# EAGLE board LCmeter0-perfboard-norelay (EAGLE 7.3.0)
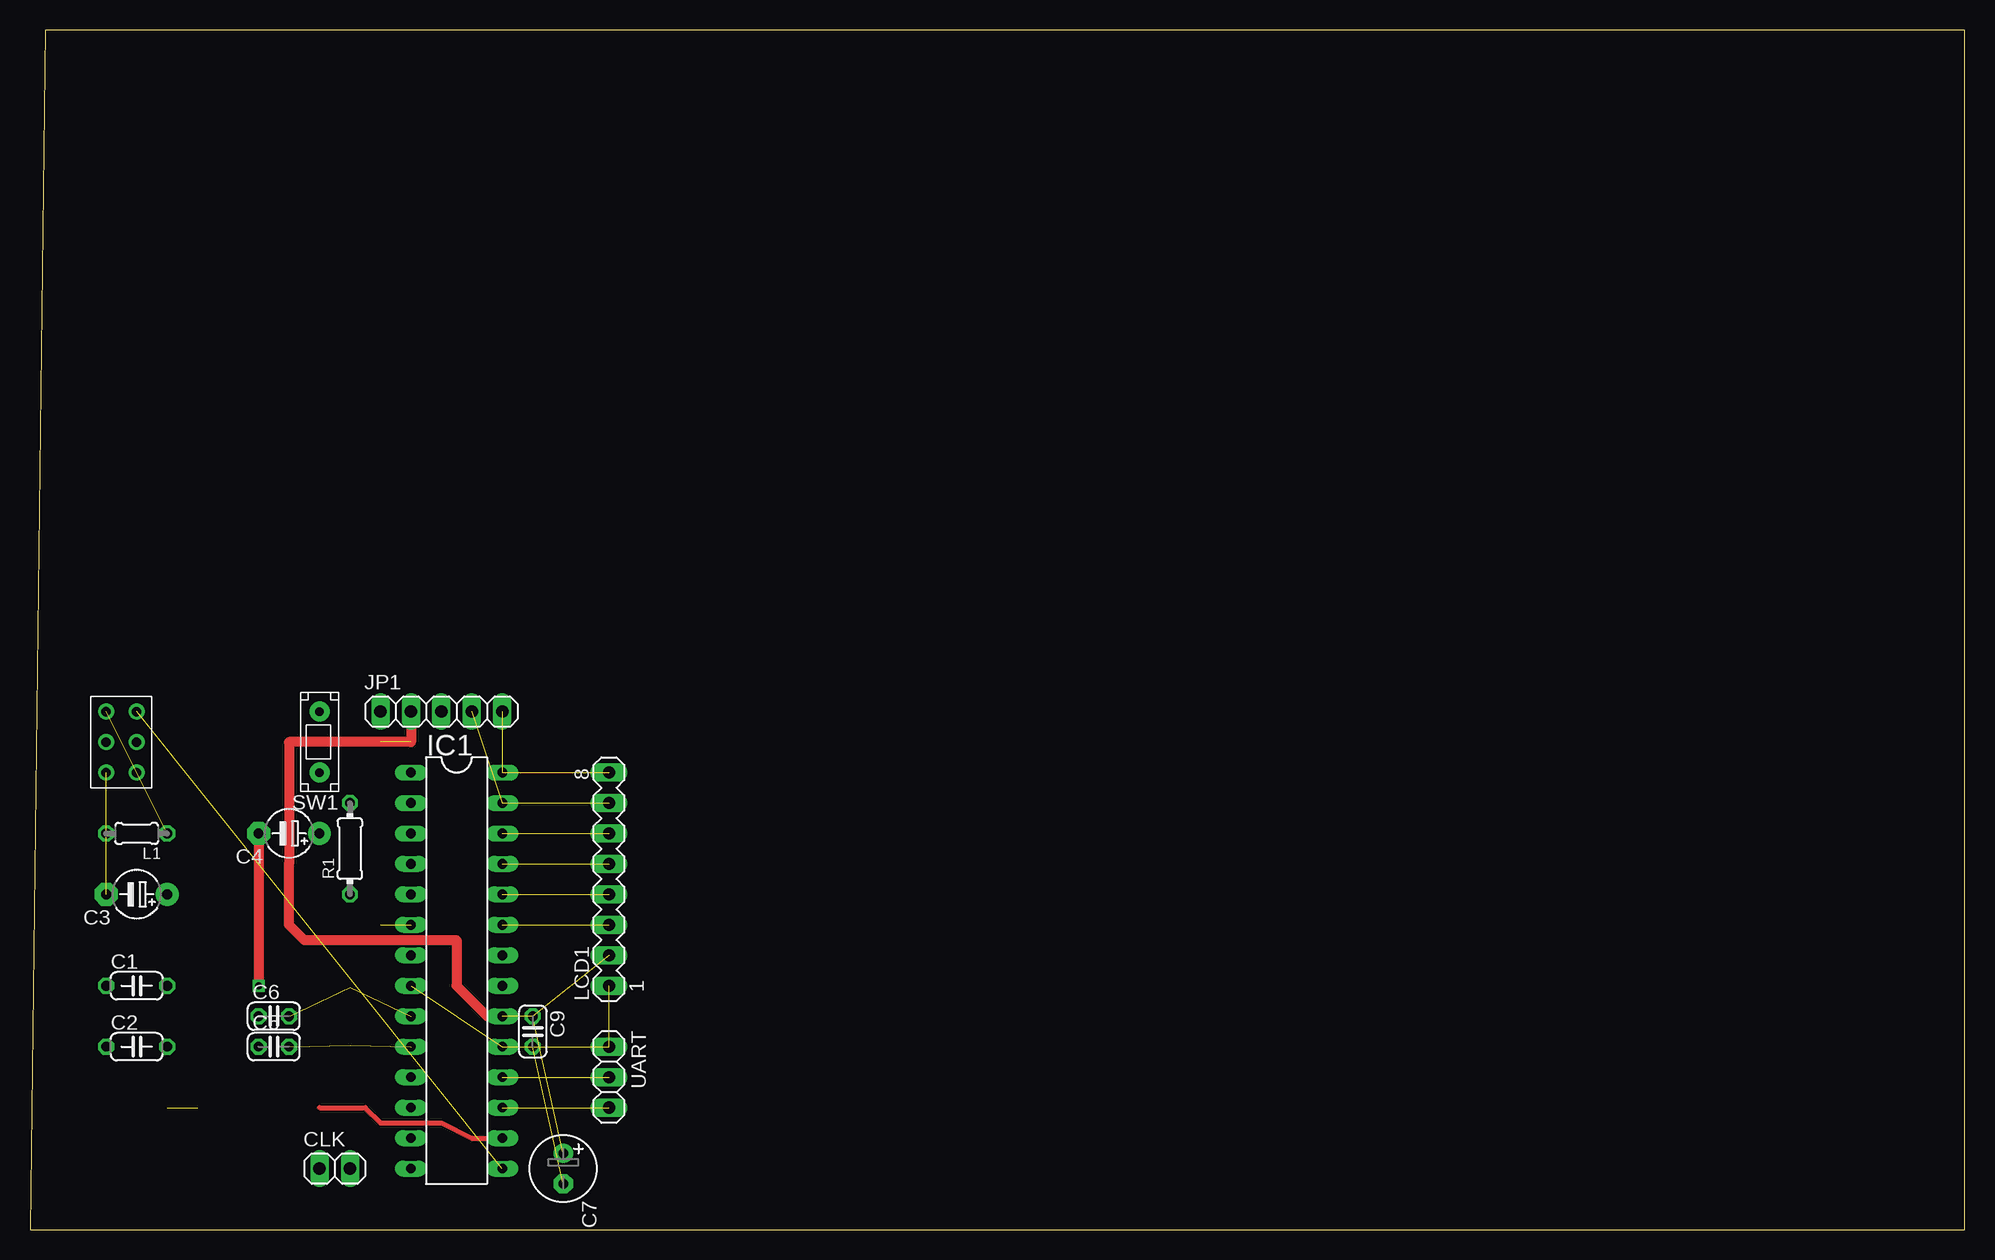
[diagram p0: board, top side]
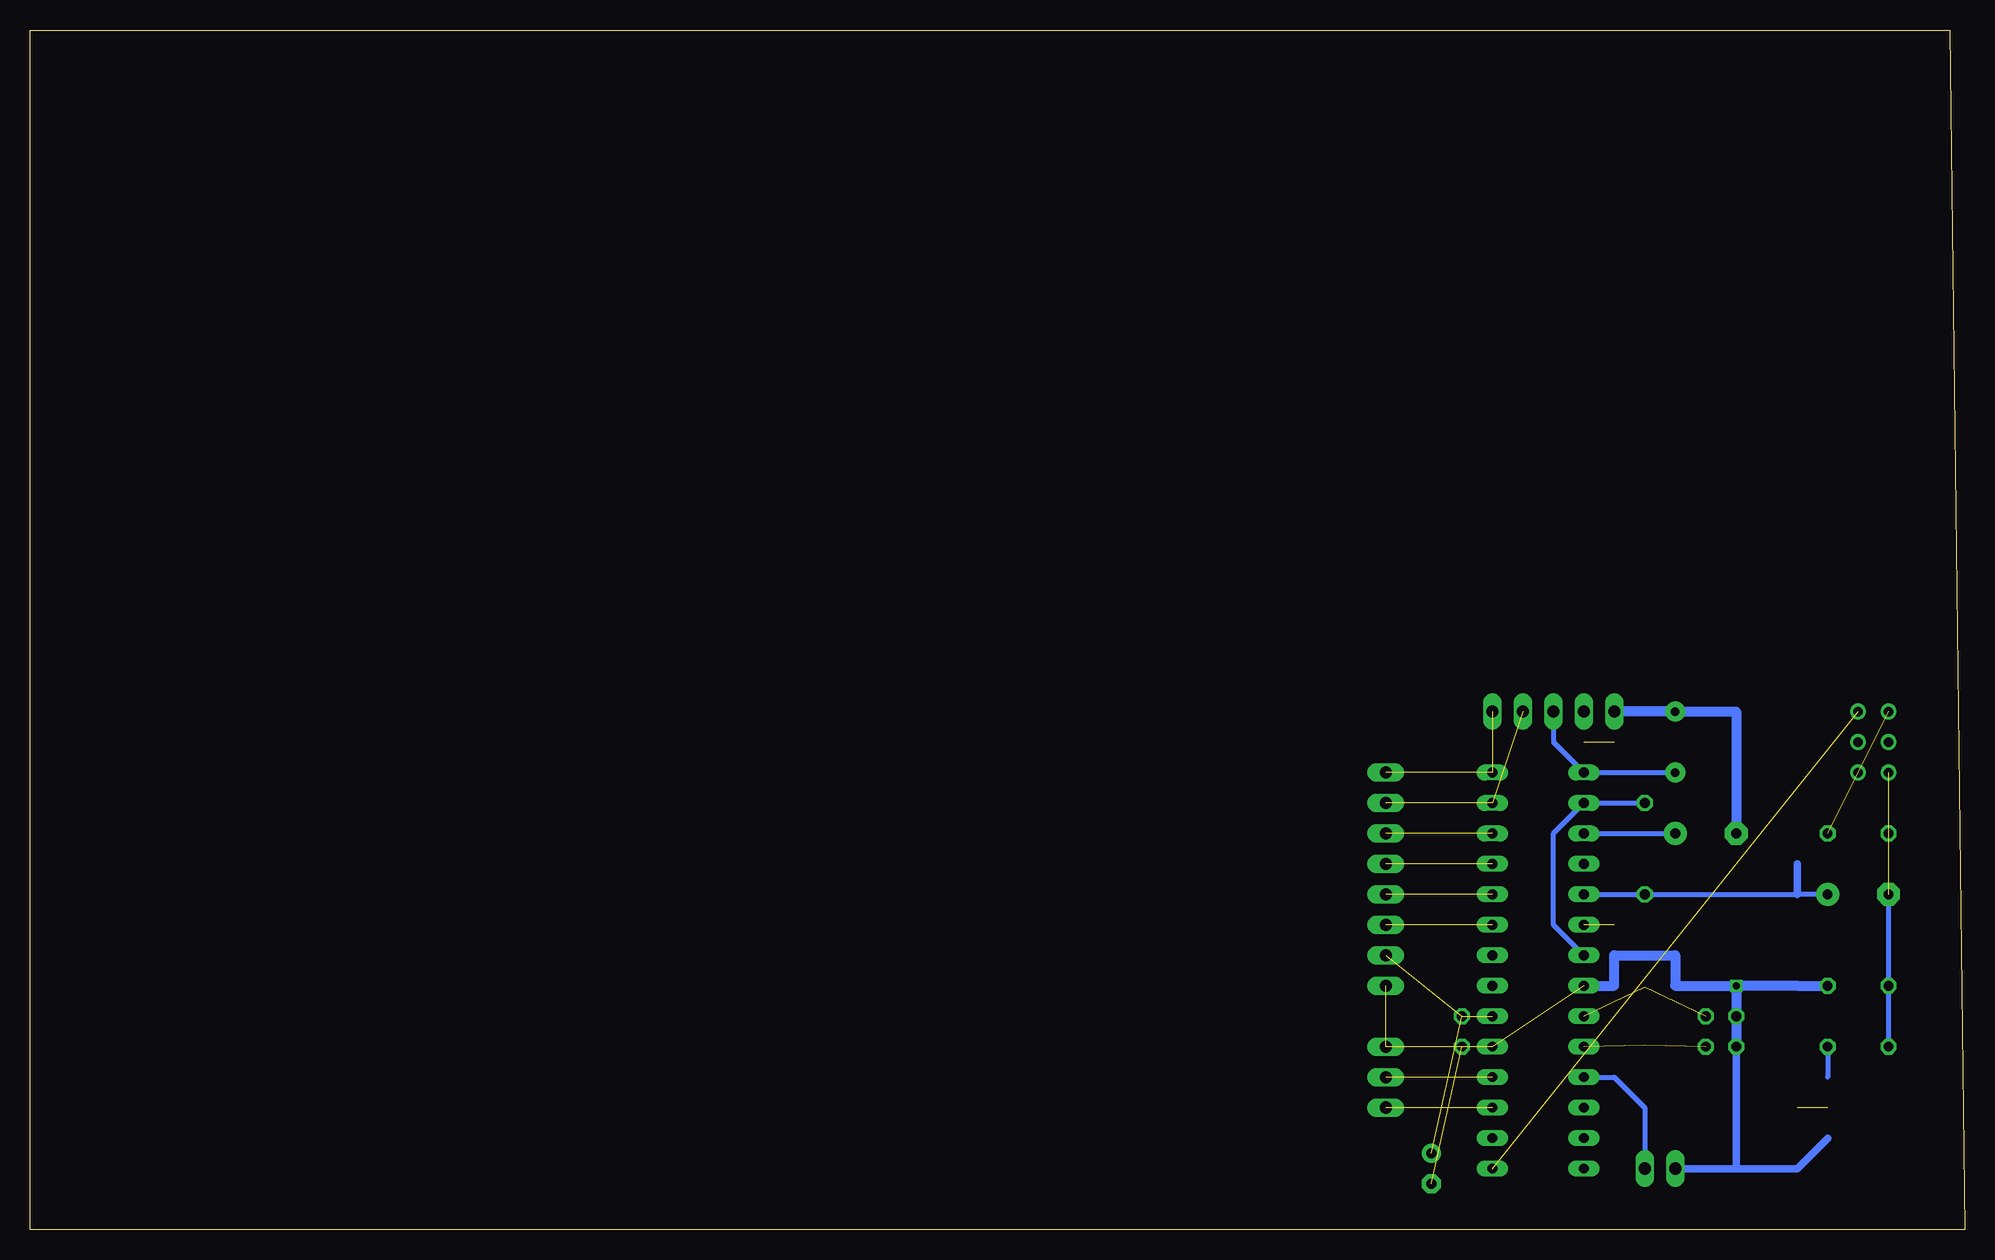
[diagram p1: board, bottom side, seen from below]

Size 161.27 x 100 mm. Coordinates in mm from the lower left corner, seen from the top.
Outline: 0,0 161.27,0 161.27,100 1.27,100 0,0
Copper layers (1*16): Top 0.035mm / dielectric 1.5mm / Bottom 0.035mm
Design rules "default": minimum track width 10mil, minimum drill 24mil, track to track 8mil, track to pad 8mil, pad to pad 8mil, via to via 8mil, smd to smd 8mil, copper to edge 40mil, drill to drill 8mil, minimum pad ring 10mil, minimum via ring 8mil, stop-mask expansion 4mil, vias tented up to drill 0mil, thermal gap 10mil

## Footprints (pad centres in the part's own frame; a part is rotated, then mirrored left to right if it is on the bottom)
C050-024X044 = drill 0.813 octagon: 1 -2.54,0; 2 2.54,0
E5-4 = drill 0.813 pad 1.905: + -2.54,0 | drill 0.813 pad 1.905 octagon: - 2.54,0
C025-024X044 = drill 0.813 octagon: 1 -1.27,0; 2 1.27,0
E2,5-6 = drill 0.813 pad 1.6: + -1.27,0 | drill 0.813 pad 1.6 octagon: - 1.27,0
1X02 = drill 1.016 long: 1 -1.27,0; 2 1.27,0
DIL28-3 = drill 0.813 long: 1 -16.51,-3.81; 2 -13.97,-3.81; 3 -11.43,-3.81; 4 -8.89,-3.81; 5 -6.35,-3.81; 6 -3.81,-3.81; 7 -1.27,-3.81; 8 1.27,-3.81; 9 3.81,-3.81; 10 6.35,-3.81; 11 8.89,-3.81; 12 11.43,-3.81; 13 13.97,-3.81; 14 16.51,-3.81; 15 16.51,3.81; 16 13.97,3.81; 17 11.43,3.81; 18 8.89,3.81; 19 6.35,3.81; 20 3.81,3.81; 21 1.27,3.81; 22 -1.27,3.81; 23 -3.81,3.81; 24 -6.35,3.81; 25 -8.89,3.81; 26 -11.43,3.81; 27 -13.97,3.81; 28 -16.51,3.81
1X05 = drill 1.016 long: 1 -5.08,0; 2 -2.54,0; 3 0,0; 4 2.54,0; 5 5.08,0
0204/5 = drill 0.813 octagon: 1 -2.54,0; 2 2.54,0
MA08-1 = drill 1.016 long: 1 -8.89,0; 2 -6.35,0; 3 -3.81,0; 4 -1.27,0; 5 1.27,0; 6 3.81,0; 7 6.35,0; 8 8.89,0
0204/7 = drill 0.813 octagon: 1 -3.81,0; 2 3.81,0
PB-5-1 = drill 0.7 pad 1.676: 2 1.27,1.27; 4 1.27,6.35
DPDT = drill 0.8: 1-1 0,1.27; 1-2 -2.54,1.27; 1-3 2.54,1.27; 2-1 0,-1.27; 2-2 -2.54,-1.27; 2-3 2.54,-1.27
1X03 = drill 1.016 long: 1 -2.54,0; 2 0,0; 3 2.54,0

## Placement (x,y rotation side)
C1  1nF  [C050-024X044]  8.89,20.32 0 top
C2  1nF  [C050-024X044]  8.89,15.24 0 top
C3  10μF  [E5-4]  8.89,27.94 180 top
C4  10μF  [E5-4]  21.59,33.02 180 top
C5  33pF  [C025-024X044]  20.32,15.24 0 top
C6  33pF  [C025-024X044]  20.32,17.78 0 top
C7  100μF  [E2,5-6]  44.45,5.08 270 top
C9  100nF  [C025-024X044]  41.91,16.51 270 top
CLK  [1X02]  25.4,5.08 0 top
IC1  PIC16F876A-X/SP  [DIL28-3]  35.56,21.59 270 top
JP1  [1X05]  34.29,43.18 0 top
L1  860u  [0204/5]  8.89,33.02 180 top
LCD1  HD44780  [MA08-1]  48.26,29.21 90 top
Q1  20MHz  [HC49/S]  26.67,17.78 270 top
Q2  BC548  [TO92-EBC]  12.7,10.16 270 top
R1  100kΩ  [0204/7]  26.67,31.75 90 top
R2  100kΩ  [0204/7']  13.97,24.13 90 top
R3  100kΩ  [0204/7']  17.78,30.48 0 top
R4  47kΩ  [0204V]  29.21,34.29 90 top
R5  4.7kΩ  [0204/7']  25.4,25.4 180 top
R6  10kΩ  [0207/10]  19.05,10.16 180 top
R10  4.7kΩ  [0204V]  29.21,39.37 90 top
SW1  SPST  [PB-5-1]  25.4,44.45 180 top
SW2  DPDT  [DPDT]  7.62,40.64 90 top
UART  [1X03]  48.26,12.7 270 top

## Library data of the parts
C1-C7 C9 L1 R1 = rcl
CLK JP1 UART = pinhead
IC1 SW1 SW2 = mcu
LCD1 = con-lstb; OC_FARNELL: unknown; OC_NEWARK: unknown
Q1 = q; OC_FARNELL: 1667008; OC_NEWARK: unknown
Q2 = t
R2-R6 R10 = r

## Nets
/LC: IC1.15 SW2.2-3
/MCLR: IC1.1 JP1.3 R10.1 SW1.4
A0: IC1.2 IC1.7 R1.2 R4.2
A1: C4.+ IC1.3 R4.1
A3: C3.+ IC1.5 R1.1 R2.2 R3.1
A4: IC1.6 R5.1
C2_CON: C2.2 Q2.C
CCAP: IC1.16 R6.1
D4: IC1.25 LCD1.5
D5: IC1.26 LCD1.6
D6: IC1.27 JP1.4 LCD1.7
D7: IC1.28 JP1.5 LCD1.8
E: IC1.24 LCD1.4
GND: C1.2 C4.- C5.1 C6.1 C7.- C9.2 CLK.1 IC1.8 IC1.19 JP1.1 LCD1.1 Q2.E R2.1 SW1.2 UART.1
N$1: CLK.2 IC1.11
N$2: C1.1 C2.1 C3.- L1.2 SW2.1-2
N$3: IC1.12
N$5: Q2.B R6.2
N$7: L1.1 SW2.1-3 SW2.2-2
OSC1: C6.2 IC1.9 Q1.1
OSC2: C5.2 IC1.10 Q1.2
RS: IC1.23 LCD1.3
RX: IC1.18 UART.2
TX: IC1.17 UART.3
VCC: C7.+ C9.1 IC1.20 JP1.2 LCD1.2 R3.2 R5.2 R10.2

## Tracks (layer width: path | path; a pad name or v marks a point on that pad's centre or on a via)
/LC  (1 unrouted)
/MCLR
  Bottom 0.406: JP1.3 34.29,40.64 IC1.1 29.21,38.1 SW1.4
A0
  Bottom 0.406: IC1.7 34.29,25.4 34.29,33.02 IC1.2 29.21,35.56 R1.2
A1
  Bottom 0.406: IC1.3 29.21,33.02 C4.+
A3
  Bottom 0.406: IC1.5 R1.1 13.97,27.94 C3.+
  Bottom 0.61: 13.97,30.48 13.97,27.94
A4  (1 unrouted)
C2_CON
  Bottom 0.406: C2.2 11.43,12.7
CCAP
  Top 0.406: 24.13,10.16 27.94,10.16 29.21,8.89 34.29,8.89 36.83,7.62 IC1.16
D4  (1 unrouted)
D5  (1 unrouted)
D6  (2 unrouted)
D7  (2 unrouted)
E  (1 unrouted)
GND  (via drill 0.6)  (5 unrouted)
  Top 0.813: C4.- v19.05,20.32
  Bottom 0.61: 19.05,5.08 CLK.1 | 11.43,7.62 13.97,5.08 19.05,5.08 | 19.05,5.08 C5.1 v19.05,20.32 C1.2
  Bottom 0.813: C4.- 19.05,43.18 SW1.2 JP1.1 | v19.05,20.32 C6.1 C5.1 | IC1.8 29.21,20.32 29.21,22.86 24.13,22.86 24.13,20.32 v19.05,20.32 | v19.05,20.32 13.97,20.32 C1.2
N$1
  Bottom 0.406: IC1.11 29.21,12.7 26.67,10.16 CLK.2
N$2  (2 unrouted)
  Bottom 0.406: C1.1 C3.- C2.1
N$5  (1 unrouted)
N$7  (2 unrouted)
OSC1  (2 unrouted)
OSC2  (2 unrouted)
RS  (1 unrouted)
RX  (1 unrouted)
TX  (1 unrouted)
VCC  (4 unrouted)
  Top 0.813: JP1.2 31.75,40.64 21.59,40.64 21.59,30.48 21.59,25.4 22.86,24.13 35.56,24.13 35.56,20.32 38.1,17.78 IC1.20